# EAGLE board MyoWare Proto Shield (EAGLE 6.5.0)
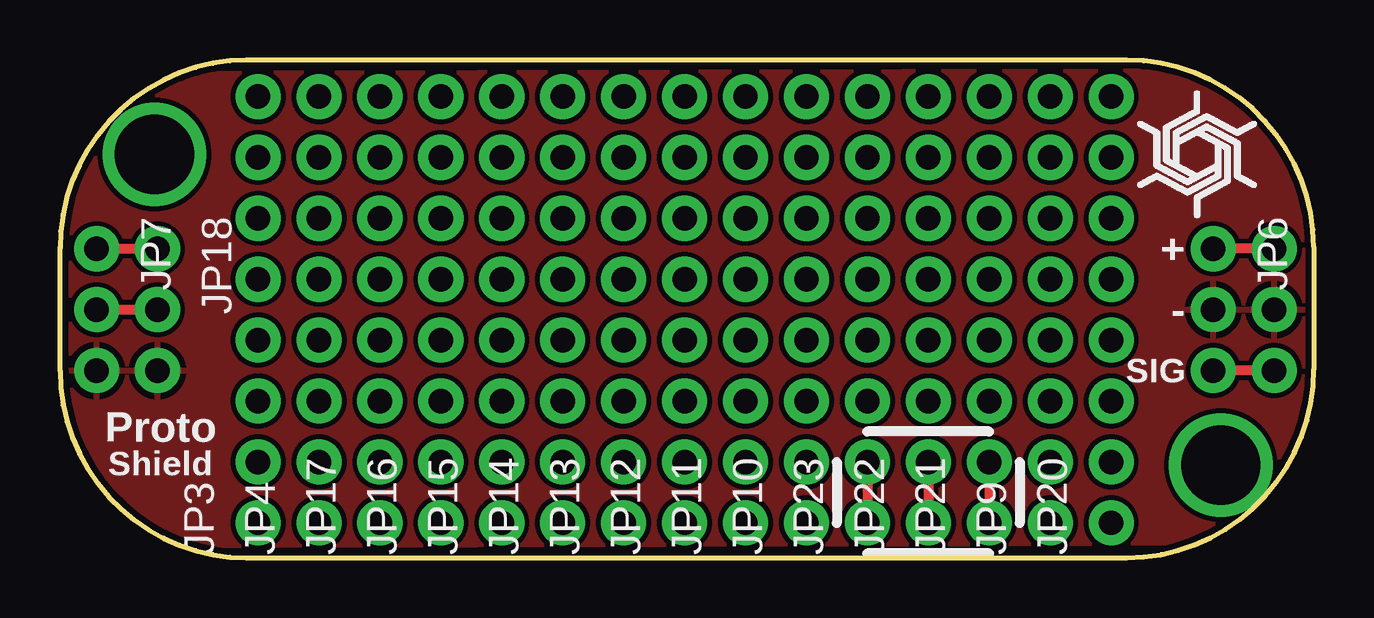
[diagram p0: board, top side]
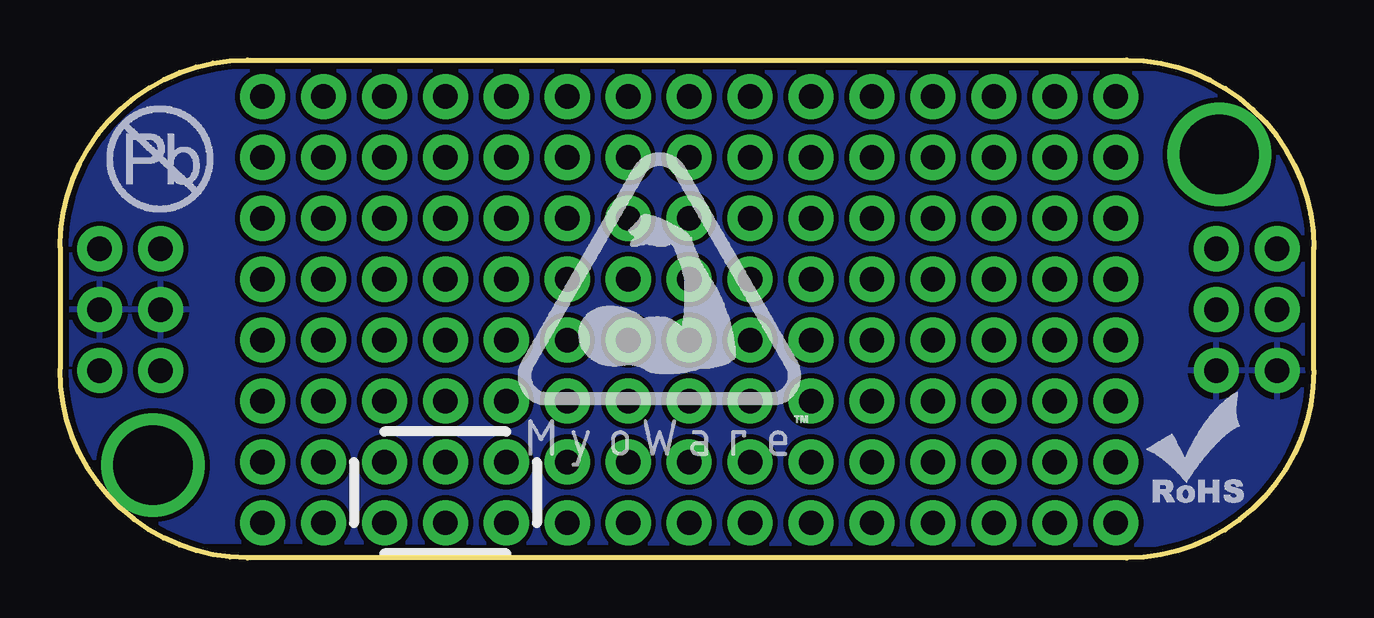
[diagram p1: board, bottom side, seen from below]

Size 52.26 x 20.76 mm. Coordinates in mm from the lower left corner, seen from the top.
Outline: 7.78,0 44.45,0 arc90 52.26,7.87 52.26,12.95 arc90 44.45,20.76 7.81,20.76
Outline: 7.81,20.76 7.78,20.76
Outline: 0,12.89 0,7.81 arc90 7.81,0
Outline: 0,12.89 0,12.95
Outline: 7.81,20.76 arc90 0,12.89
Copper layers (1*16): Top 0.0356mm / dielectric 63mil / Bottom 0.0356mm
Design rules "AdvancedCircuits": minimum track width 6mil, minimum drill 15mil, track to track 6mil, track to pad 6mil, pad to pad 6mil, via to via 6mil, smd to smd 6mil, copper to edge 10mil, drill to drill 6mil, minimum pad ring 12mil, minimum via ring 10mil, stop-mask expansion 4mil, vias tented up to drill 25mil, thermal gap 10mil

## Footprints (pad centres in the part's own frame; a part is rotated, then mirrored left to right if it is on the bottom)
1X03_NO_SILK = drill 1.016 pad 1.88: 1 0,0; 2 2.54,0; 3 5.08,0
1X08_NO_SILK = drill 1.016 pad 1.88: 1 0,0; 2 2.54,0; 3 5.08,0; 4 7.62,0; 5 10.16,0; 6 12.7,0; 7 15.24,0; 8 17.78,0

## Placement (x,y rotation side)
JP2  Power  [1X03_NO_SILK]  50.61,12.89 270 top
JP3  [1X08_NO_SILK]  8.26,1.46 90 top
JP4  [1X08_NO_SILK]  10.79,1.46 90 top
JP6  Power  [1X03_NO_SILK]  48.07,12.89 270 top
JP7  Raw  [1X03_NO_SILK]  1.52,12.89 270 top
JP9  [1X08_NO_SILK]  41.28,1.46 90 top
JP10  [1X08_NO_SILK]  31.11,1.46 90 top
JP11  [1X08_NO_SILK]  28.57,1.46 90 top
JP12  [1X08_NO_SILK]  26.04,1.46 90 top
JP13  [1X08_NO_SILK]  23.49,1.46 90 top
JP14  [1X08_NO_SILK]  20.95,1.46 90 top
JP15  [1X08_NO_SILK]  18.41,1.46 90 top
JP16  [1X08_NO_SILK]  15.88,1.46 90 top
JP17  [1X08_NO_SILK]  13.34,1.46 90 top
JP18  Raw  [1X03_NO_SILK]  4.06,12.89 270 top
JP20  [1X08_NO_SILK]  43.82,1.46 90 top
JP21  [1X08_NO_SILK]  38.73,1.46 90 top
JP22  [1X08_NO_SILK]  36.2,1.46 90 top
JP23  [1X08_NO_SILK]  33.66,1.46 90 top
U$1  [MYOWARE_LOGO]  27.3,10.35 0 bottom
U$3  [ROHS]  6.98,2.29 0 bottom
U$5  [PB-FREE]  50.38,14.35 0 bottom
U$9  [SPIRAL_LOGO_60%]  47.43,16.83 0 top

## Library data of the parts
JP2-JP4 JP6 JP7 JP9-JP18 JP20-JP23 = SparkFun-Connectors
U$1 U$3 U$5 U$9 = advancer-technologies

## Nets
+VS/2: JP23.1 JP23.2
GND: JP2.2 JP6.2 JP7.3 JP18.3
N$3: JP21.1 JP21.2
N$4: JP2.1 JP6.1
N$5: JP22.1 JP22.2
RAW_EMG: JP7.1 JP18.1
SHIELD_PWR: JP7.2 JP18.2
SIG: JP2.3 JP6.3

## Tracks (layer width: path | path; a pad name or v marks a point on that pad's centre or on a via)
+VS/2
  Top 0.406: JP23.2 JP23.1
GND
  pour Top (isolate 0.203): -0.32,0.51 52.83,0.64 52.83,20.32 -0.32,20.19
  pour Bottom (isolate 0.203): -0.32,0.51 52.83,0.7 52.83,20.38 -0.32,20.19
N$1  (via drill 3.3)
  other vias: 3.94,16.83
N$2  (via drill 3.3)
  other vias: 48.39,3.87
N$3
  Top 0.406: JP21.2 JP21.1
N$4
  Top 0.406: JP2.1 JP6.1
N$5
  Top 0.406: JP22.2 JP22.1
RAW_EMG
  Top 0.406: JP7.1 JP18.1
SHIELD_PWR
  Top 0.406: JP7.2 JP18.2
SIG
  Top 0.406: JP2.3 JP6.3

## Text on the board
tPlace: + | - | SIG | Proto | Shield